# Altium PCB Main_PCB.PcbDoc
Units mm, origin at the board's own origin, x right, y up, seen from the top; angles counter-clockwise.
Board outline 150 x 60 mm, 2 copper layers (Top Layer, Bottom Layer); 25 components, 31 nets, 142 pads, 30 vias.
Unrouted connection lines stored in the file: 81.
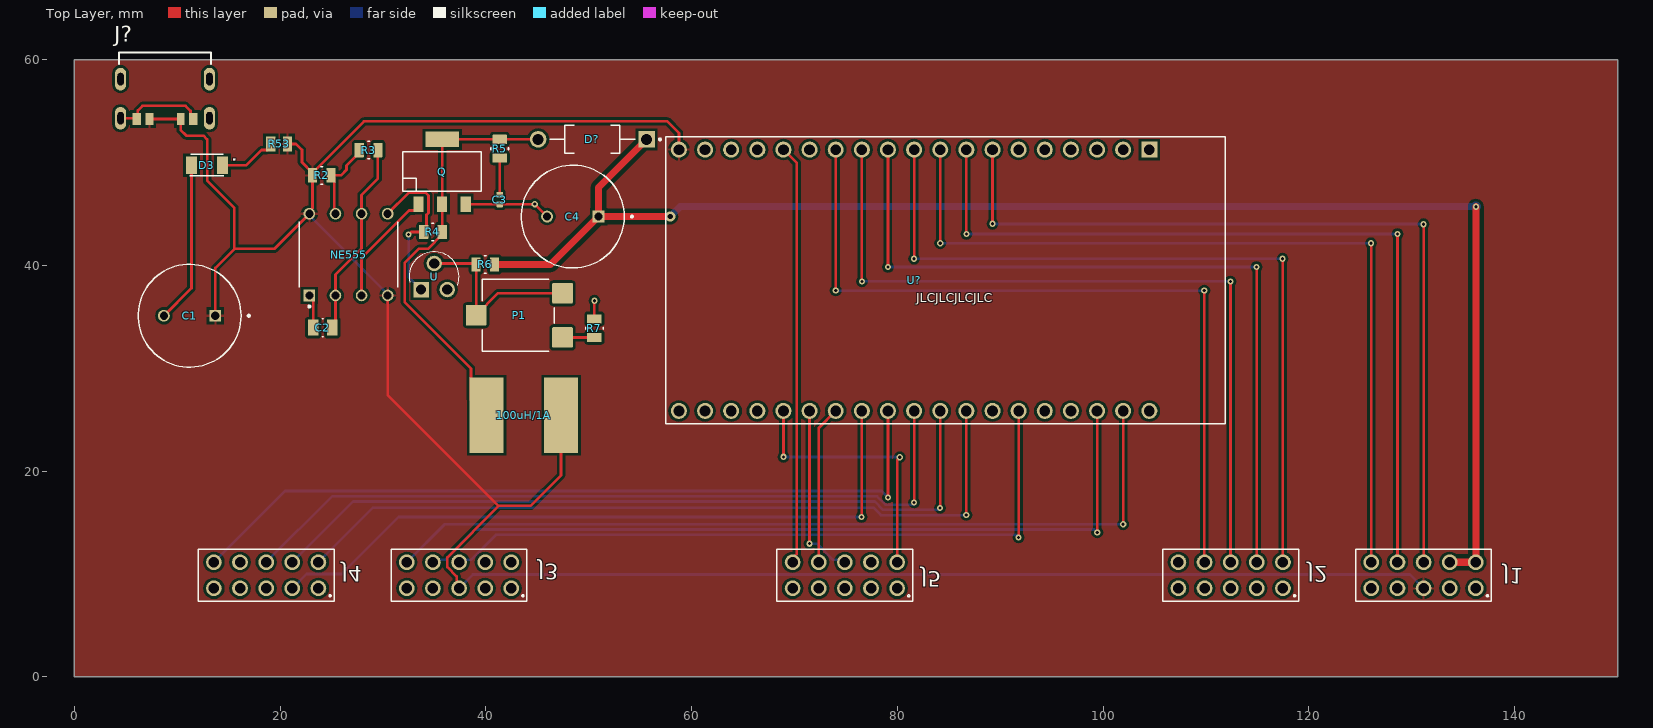
[diagram p0: Top Layer view]
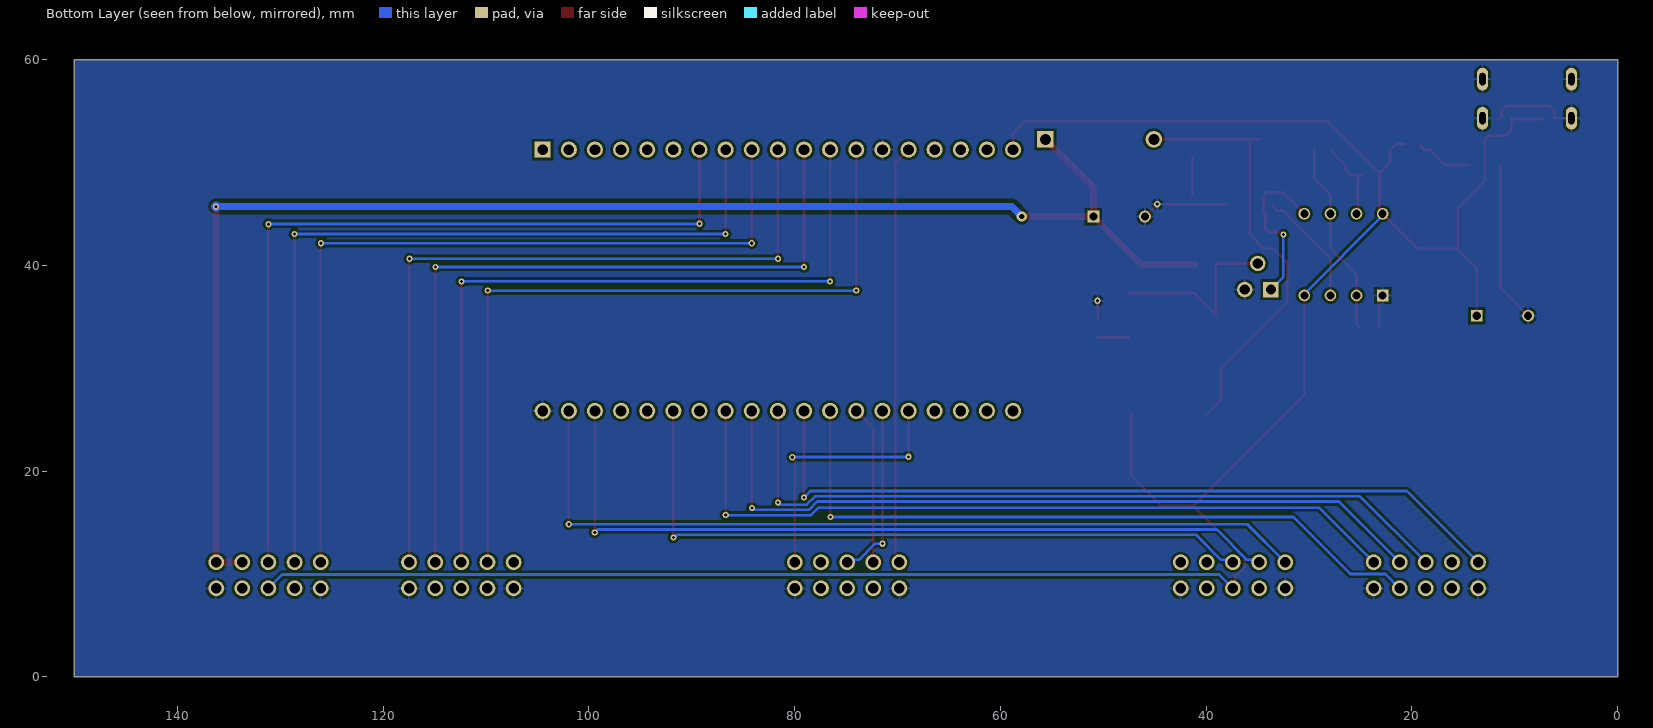
[diagram p1: Bottom Layer view, seen from below]

## Layer stack, top to bottom
Top Solder: solder mask 0.0102, Solder Resist, Dk 3.5
Top Layer: signal copper 0.0356
Dielectric 1: dielectric 0.32, FR-4, Dk 4.8
Bottom Layer: signal copper 0.0356
Bottom Solder: solder mask 0.0102, Solder Resist, Dk 3.5

## Board outline
0,0 0,60 150,60 150,0

## Design rules (kind name [scope] priority, off if disabled: settings)
Clearance Clearance_U5 [InComponent('U5')] p1: gap=0.25 ignorepadtopadclearanceinfootprint=FALSE except(0.15: Arc-SMDPad Arc-THPad Arc-Via Track-SMDPad Track-THPad Track-Via SMDPad-SMDPad SMDPad-THPad SMDPad-Via THPad-THPad THPad-Via Via-Via)
Clearance [All] p2: gap=0.25 ignorepadtopadclearanceinfootprint=FALSE
HoleSize [All] p1: absolutevalues=TRUE maxlimit=3.2 minlimit=0.025 maxpercent=80.000 minpercent=20.000
MinimumSolderMaskSliver [All] p1: minsoldermaskwidth=0.15
PolygonConnect [All] p1: connectstyle=Relief reliefconductorwidth=0.254 reliefentries=4 polygonreliefangle="90 Angle" airgapwidth=0.254
RoutingVias [All] p1: holewidth=0.3 width=0.6 viastyle="Through Hole" minholewidth=0.3 minwidth=0.6 maxholewidth=0.3 maxwidth=0.6
SilkToSilkClearance [All] p1: silktosilkclearance=0.16
SilkToSolderMaskClearance [IsPad] p1: minsilkscreentomaskgap=0.1 clearancetoexposedcopper=TRUE
SolderMaskExpansion [All] p1: expansion=0.1 istentingtop=FALSE
Width [All] p1: maxlimit=0.5 minlimit=0.26 preferedwidth=0.26 minimp=50.000000 maximp=50.000000 favimp=50.000000
26 further rules are at their usual default settings.

## Components (designator, comment, footprint, x,y, rotation, side; value= is the part's Value field where it differs from the comment)
100uH/1A "ASMCI" PCBComponent_1 45.02,25.044 r90 top
C1 "470uF" CAPPRD500W60D1000H2200 11.2,35.1 r180 top
C2 "2n2 / 50V" C_0805_A 24.146,33.944 r0 top
C3 "100p /25V" C_0402_A 41.346,46.395 r90 top
C4 "4.7uF" CAPPRD500W60D1000H2200 48.446,44.744 r180 top
D3 "Rot" *LEDC3216X110_LTST-C230KFKT(Primary) 12.888,49.732 r0 top
D? "UF4004" DIOAD1055W87L533D272 50.346,52.244 r180 top
J1 "61301021821" *61301021821 131.14,9.874 r180 top
J2 "61301021821" *61301021821 112.39,9.874 r180 top
J3 "61301021821" *61301021821 37.39,9.874 r180 top locked
J4 "61301021821" *61301021821 18.64,9.874 r180 top
J5 "61301021821" *61301021821 74.89,9.874 r180 top
J? "USB4125-GF-A_REVA" GCT_USB4125-GF-A_REVA 8.812,54.3 r180 top
NE555 "NE555PE4" DIP794W45P254L959H508Q8 26.646,41.044 r90 top
P1 "2k" R_CA6V_SMD 43.246,35.144 r180 top
Q "STN4NF20L" SOT223 35.746,45.945 r0 top
R2 "1k" R_0805_A 24.046,48.744 r180 top
R3 "10k" R_0805_A 28.6,51.206 r180 top
R4 "56k" R_0805_A 34.846,43.244 r0 top
R5 "2k2" R_0805_A 41.346,51.344 r90 top
R6 "220k" R_0805_A 39.946,40.084 r0 top
R7 "470R" R_0805_A 50.546,33.894 r270 top
R53 "Res2" *CAPC2013X90N 19.9,51.8 r0 top value=1.2K
U "BC547B" TO127P254X732-3 36.246,40.184 r0 top
U? "ESP32-DEVKITC-32D" MODULE_ESP32-DEVKITC-32D 84.72,38.544 r270 top

## Footprints (in the part's own frame and the unit in brackets; to place one, negate y for a bottom-side part, rotate by r counter-clockwise, add the part's x,y. Pads: shape width x height; smd on the part's side, far side on the other; paste and mask are expansions set on the pad)
*61301021821 [mm]
  round 1.53 hole 1.02: 1(-5.08,1.27) 2(-5.08,-1.27) 3(-2.54,1.27) 4(-2.54,-1.27) 5(0,1.27) 6(0,-1.27) 7(2.54,1.27) 8(2.54,-1.27) 9(5.08,1.27) 10(5.08,-1.27)
  silkscreen extent -6.6,-2.54 6.6,2.54
*CAPC2013X90N [mil]
  rect 36x57 smd: 1(-32,0) 2(32,0)
*LEDC3216X110_LTST-C230KFKT(Primary) [mm]
  rect 1.1x1.73 smd: A(1.51,0) C(-1.51,0)
  silkscreen extent -1.65,-1.04 1.65,1.04, body extent -1.6,-0.8 1.6,0.8, height 1.1
C_0402_A [mm] "Chip Capacitor, 2-Leads, Body 1.00x0.50mm, IPC High Density"
  rrect10% 0.6x0.6 smd: 1(-0.45,0) 2(0.45,0)
  body extent -0.55,-0.3 0.55,0.3, height 0.6
C_0805_A [mm] "Chip Capacitor, 2-Leads, Body 2.00x1.25mm"
  rrect10% 1.05x1.55 smd: 1(-0.925,0) 2(0.925,0)
  silkscreen extent -0.05,-0.87 0.05,0.87, body extent -1.1,-0.72 1.1,0.73, height 0.7
CAPPRD500W60D1000H2200 [mm]
  round 1.15 hole 0.8: N(2.5,0)
  rect 1.15x1.15 hole 0.8: P(-2.5,0)
  silkscreen extent -5.85,-5 5,5
DIOAD1055W87L533D272 [mm]
  round 1.61 hole 1.07: A(5.275,0)
  rect 1.61x1.61 hole 1.07: C(-5.275,0)
  silkscreen extent -6.67,-1.36 4.15,1.36, body extent -1.17,-1.17 1.17,1.17, height 27.72
DIP794W45P254L959H508Q8 [mm]
  rect 1.13x1.13 hole 0.78: 1(-3.97,3.81)
  round 1.13 hole 0.78: 2(-3.97,1.27) 3(-3.97,-1.27) 4(-3.97,-3.81) 5(3.97,-3.81) 6(3.97,-1.27) 7(3.97,1.27) 8(3.97,3.81)
  silkscreen extent -5.13,-4.79 3.18,4.79
GCT_USB4125-GF-A_REVA [mm]
  rect 0.76x1.2 smd: A9(1.52,0.08) B9(-1.52,0.08)
  rect 0.8x1.2 smd: A12(2.75,0.08) B12(-2.75,0.08)
  oval 1.1x2.2 hole 0.6 slot 1.2 at 90 deg: S1(-4.32,0) S2(4.32,0) S3(-4.32,-3.8) S4(4.32,-3.8)
  silkscreen extent -4.47,-6.4 4.47,-5.25
MODULE_ESP32-DEVKITC-32D [mm]
  rect 1.56x1.56 hole 1.04: 1(-12.7,19.76)
  round 1.56 hole 1.04: 2(-12.7,17.22) 3(-12.7,14.68) 4(-12.7,12.14) 5(-12.7,9.6) 6(-12.7,7.06) 7(-12.7,4.52) 8(-12.7,1.98) 9(-12.7,-0.56) 10(-12.7,-3.1) 11(-12.7,-5.64) 12(-12.7,-8.18) 13(-12.7,-10.72) 14(-12.7,-13.26) 15(-12.7,-15.8) 16(-12.7,-18.34) 17(-12.7,-20.88) 18(-12.7,-23.42) 19(-12.7,-25.96) 20(12.7,19.76) 21(12.7,17.22) 22(12.7,14.68) 23(12.7,12.14) 24(12.7,9.6) 25(12.7,7.06) 26(12.7,4.52) 27(12.7,1.98) 28(12.7,-0.56) 29(12.7,-3.1) 30(12.7,-5.64) 31(12.7,-8.18) 32(12.7,-10.72) 33(12.7,-13.26) 34(12.7,-15.8) 35(12.7,-18.34) 36(12.7,-20.88) 37(12.7,-23.42) 38(12.7,-25.96)
  silkscreen extent -13.95,-27.25 13.95,27.15, body extent -13.97,-24.8 13.97,30.3, height 3.25
PCBComponent_1 [mm]
  rect 7.3x3.3 smd: 2(0.381,4.953) 2(0.381,-2.286)
R_0805_A [mm] "Chip Resistor, 2-Leads, Body 2.00x1.25mm, IPC High Density"
  rrect10% 0.9x1.4 smd: 1(-0.9,0) 2(0.9,0)
  silkscreen extent -0.1,-0.85 0.1,0.85, body extent -1.07,-0.7 1.08,0.7, height 0.65
R_CA6V_SMD [mm]
  rrect10% 2x2 smd: 1(-4.2,2.15) 2(4.2,0) 3(-4.2,-2.15)
  silkscreen extent -3.4,-3.52 3.6,3.5, body extent -4.31,-3.37 4.23,3.34, height 5.2
SOT223 [mil]
  rect 39x59 smd: 1(-90,0) 2(0,0) 3(90,0)
  rect 129x59 smd: T(0,248)
  silkscreen extent -150,50 150,200
TO127P254X732-3 [mil]
  rect 59x59 hole 39: 1(-100,-100)
  round 59 hole 39: 2(-50,0) 3(0,-100)
  silkscreen extent -146,-83 45,45

## Part data
100uH/1A: library part ASMCI-0603-R10M-T, "Ind Chip Shielded Multi-Layer 100nH 20% 1MHz Ferrite 700mA 0603 T/R", Package=None, Availability=Unavailable, MP=ASMCI-0603-R10M-T, Price=None
C1 C4: library part UPM1E471MPD1TD, "PM Series 470 uF 25 V 105Â°C Ã˜10 x 20 mm LS=5 mm Radial Aluminum Electrolytic Cap", Package="Radial Nichicon", Availability=Good, Check_prices=https://www.snapeda.com/parts/UPM1E471MPD1TD/Nichicon/view-part/2321207/?ref=eda, MF=Nichicon, MP=UPM1E471MPD1TD, Price=None, Purchase-URL=https://pricing.snapeda.com/search/part/UPM1E471MPD1TD/?ref=eda, SnapEDA_Link=https://www.snapeda.com/parts/UPM1E471MPD1TD/Nichicon/view-part/2321207/?ref=snap
C2: library part "300 129", "C 2n2 10% 50V X7R 0805", %=10, A=1, Assembly=SMD, C1=x, C2=1, C3=4, Component Type=Capacitor, ComponentLink1Description=Datasheet, ComponentLink1URL="\\vm-pizol\DATEN\Fabdaten\3xx xxx\30x xxx\300 xxx\300 1xx\300129_C_2.2nF_10%_50V_X7R_0805", Cost=0.004800, Ea1=0.35, Ea2=x, Failure rate=2, Ieff=x, Imax=x, IrefImax=x, Part Number="300 129", Pin Count=2, Pmax=x, Published=08.01.2016, Publisher=RKE, State=active, Tref=40, Umax=50V, UrefUmax=0.5
C3: library part "301 048", "C 100p 5% 25V C0G 0402", %=5, A=1, Assembly=SMD, C1=x, C2=1, C3=4, Component Type=Capacitor, ComponentLink1Description=Datasheet, ComponentLink1URL="\\vm-pizol\DATEN\Fabdaten\3xx xxx\30x xxx\301 xxx\301 0xx\301048_C_100pF_5%_25V_COG_0402", Cost=0.001200, Ea1=0.35, Ea2=x, Failure rate=1, Ieff=x, Imax=x, IrefImax=x, Part Number="301 048", Pin Count=2, Pmax=x, Published=08.01.2016, Publisher=RKE, State=active, Tref=40, Umax=25V, UrefUmax=0.5
D3: library part LTST-C230KFKT, "LED; SMD; 1206; orange; 45-90mcd; 3.2x1.6x1.1mm; 130Â°; 2Ã·2.4V; 20mA", Package="1206 Lite-On", Availability=Unavailable, MF="Lite-On Inc.", MP=LTST-C230KFKT, Price=None, SnapEDA_Link=https://www.snapeda.com/parts/LTST-C230KFKT/Lite-On%20Inc./view-part/?ref=snap
D?: "Diode Standard 400V 1A Through Hole DO-204AL (DO-41)", Package="DO-41-2 ON Semiconductor", Availability=Good, MF="ON Semiconductor", MP=UF4004, Price=None, Purchase-URL=https://pricing.snapeda.com/search/part/UF4004/?ref=eda, SnapEDA_Link=https://www.snapeda.com/parts/UF4004/ON%20Semiconductor/view-part/1592468/?ref=snap
J1 J2 J3 J4 J5: "Female header [WÃ¼rth Elektronik] 61301021821 Female header", Package=None, Digi-Key_Part_Number=732-2861-ND, Digi-Key_Purchase_URL=https://www.digikey.ch/product-detail/en/wurth-electronics-inc/61301021821/732-2861-ND/2508630?utm_source=snapeda&utm_medium=aggregator&utm_campaign=symbol, MF="Wurth Electronics", MP=61301021821, SnapEDA_Link=https://www.snapeda.com/parts/61301021821/Wurth%20Electronics%20Inc./view-part/?ref=snap
J?: "USB 2.0 Type C Receptacle, Horizontal, SMT, For Power charging", Package=None, Availability=Unavailable, Check_prices=https://www.snapeda.com/parts/USB4125-GF-A/Global%20Connector%20Technology/view-part/5160675/?ref=eda, MF="Global Connector Technology", MP=USB4125-GF-A, Price=None, SnapEDA_Link=https://www.snapeda.com/parts/USB4125-GF-A/Global%20Connector%20Technology/view-part/5160675/?ref=snap
NE555: "Single Precision Timer 8-PDIP 0 to 70", Package="PDIP-8 Texas Instruments", Availability=Warning, MF="Texas Instruments", Mouser-Purchase-URL=https://snapeda.com/shop?store=Mouser&id=5082, MP=NE555PE4, Price=None, SnapEDA_Link=https://www.snapeda.com/parts/NE555PE4/Texas%20Instruments/view-part/5082/?ref=snap, Texas_Instruments-Purchase-URL=https://snapeda.com/shop?store=Texas+Instruments&id=5082
P1: library part "301 472", "R 2k 25% 100mW Trimmer lin 6.5x6.5", %=25, A=0.87, Assembly=SMD, C1=x, C2=x, C3=x, C4=x, C5=x, Component Type=Resistor, ComponentLink1Description=Datasheet, ComponentLink1URL="\\vm-pizol\DATEN\Fabdaten\3xx xxx\30x xxx\301 xxx\301 4xx\301472_R_2K_25%_Trimmpoti_CA6V_lin", Cost=0.120300, Ea1=0.16, Ea2=0.44, Failure rate=30, Ieff=x, Imax=x, IrefImax=x, LatestRevisionDate=30.06.2016/RKE, Part Number="301 472", Pin Count=3, Pmax=0.100, Published=29.04.2016, Publisher=MFL, State=active, SW Count=x, Tref=55, Ueff=x, Umax=100V, Uref=x, UrefUmax=x
Q: "N-Channel 200V 1A _Tc_ 3.3W _Tc_ Surface Mount SOT-223", Package="SOT-223 STMicroelectronics", Availability=Unavailable, MF=STMicroelectronics, MP=STN4NF20L, Price=None, SnapEDA_Link=https://www.snapeda.com/parts/STN4NF20L/STMicroelectronics/view-part/106602/?ref=snap
R2: library part "300 074", "R 1k 1% 125mW 0805", %=1, A=0.87, Assembly=SMD, C1=x, C2=x, C3=x, C4=x, C5=x, Component Type=Resistor, ComponentLink1Description=Datasheet, ComponentLink1URL="\\vm-pizol\DATEN\Fabdaten\3xx xxx\30x xxx\300 xxx\300 0xx\300074_R_1K_5%_125mW_0805", Cost=0.002000, Ea1=0.16, Ea2=0.44, Failure rate=0.2, Ieff=x, Imax=x, IrefImax=x, Part Number="300 074", Pin Count=2, Pmax=0.125, Published=27.04.2016, Publisher=MFL, State=active, SW Count=x, Tref=55, Ueff=x, Uref=x, UrefUmax=x
R3: library part "300 080", "R 10k 1% 125mW 0805", %=1, A=0.87, Assembly=SMD, C1=x, C2=x, C3=x, C4=x, C5=x, Component Type=Resistor, ComponentLink1Description=Datasheet, ComponentLink1URL="\\vm-pizol\DATEN\Fabdaten\3xx xxx\30x xxx\300 xxx\300 0xx\300080_R_10K_1%_125mW_0805", Cost=0.002000, Ea1=0.16, Ea2=0.44, Failure rate=0.2, Ieff=x, Imax=x, IrefImax=x, Part Number="300 080", Pin Count=2, Pmax=0.125, Published=27.04.2016, Publisher=MFL, State=active, SW Count=x, Tref=55, Ueff=x, Uref=x, UrefUmax=x
R4: library part "302 780", "R 56k 1% 125mW 0805", %=1, A=0.87, Assembly=SMD, C1=x, C2=x, C3=x, C4=x, C5=x, Component Type=Resistor, ComponentLink1Description=Datasheet, ComponentLink1URL="\\vm-pizol\DATEN\Fabdaten\3xx xxx\30x xxx\302 xxx\302 7xx\302780", Cost=0.003200, Ea1=0.16, Ea2=0.44, Failure rate=0.2, Ieff=x, Imax=x, IrefImax=x, Part Number="302 780", Pin Count=2, Pmax=0.125, Published=28.04.2016, Publisher=MFL, State=active, SW Count=x, Tref=55, Ueff=x, Uref=x, UrefUmax=x
R5: library part "300 848", "R 2k2 5% 125mW 0805", %=5, A=0.87, Assembly=SMD, C1=x, C2=x, C3=x, C4=x, C5=x, Component Type=Resistor, ComponentLink1Description=Datasheet, ComponentLink1URL="\\vm-pizol\DATEN\Fabdaten\3xx xxx\30x xxx\300 xxx\300 8xx\300848_R_2K2_5%_125mW_0805", Cost=0.002000, Ea1=0.16, Ea2=0.44, Failure rate=0.2, Ieff=x, Imax=x, IrefImax=x, Part Number="300 848", Pin Count=2, Pmax=0.125, Published=28.04.2016, Publisher=MFL, State=active, SW Count=x, Tref=55, Ueff=x, Uref=x, UrefUmax=x
R6: library part "300 089", "R 220k 5% 125mW 0805", %=5, A=0.87, Assembly=SMD, C1=x, C2=x, C3=x, C4=x, C5=x, Component Type=Resistor, ComponentLink1Description=Datasheet, ComponentLink1URL="\\vm-pizol\DATEN\Fabdaten\3xx xxx\30x xxx\300 xxx\300 0xx\300089_R_220K_5%_125mW_0805", Cost=0.002000, Ea1=0.16, Ea2=0.44, Failure rate=0.2, Ieff=x, Imax=x, IrefImax=x, Part Number="300 089", Pin Count=2, Pmax=0.125, Published=28.04.2016, Publisher=MFL, State=active, SW Count=x, Tref=55, Ueff=x, Uref=x, UrefUmax=x
R7: library part "300 073", "R 470R 5% 125mW 0805", %=5, A=0.87, Assembly=SMD, C1=x, C2=x, C3=x, C4=x, C5=x, Component Type=Resistor, ComponentLink1Description=Datasheet, ComponentLink1URL="\\vm-pizol\DATEN\Fabdaten\3xx xxx\30x xxx\300 xxx\300 0xx\300073_R_470R_5%_125mW_0805", Cost=0.001900, Ea1=0.16, Ea2=0.44, Failure rate=0.2, Ieff=x, Imax=x, IrefImax=x, Part Number="300 073", Pin Count=2, Pmax=0.125, Published=27.04.2016, Publisher=MFL, State=active, SW Count=x, Tref=55, Ueff=x, Uref=x, UrefUmax=x
R53: "Resistor", LatestRevisionDate=17-Jul-2002, LatestRevisionNote="Re-released for DXP Platform.", PackageDescription="Axial Device, Thru-Hole; 2 Leads; 0.4 in Pin Spacing", PackageReference=AXIAL-0.4, Published=8-Jun-2000, Publisher="Altium Limited"
U: "Bipolar _BJT_ Transistor NPN 45V 100mA 300MHz 500mW Through Hole TO-92-3", Package="TO-226-3 ITT / Cannon", Availability=Unavailable, MF="ON Semiconductor", MP=BC547B, Price=None, SnapEDA_Link=https://www.snapeda.com/parts/BC547B/ON%20Semiconductor/view-part/2777874/?ref=snap
U?: "EVAL BOARD FOR ESP-WROOM-32", Package=None, Availability=Warning, Check_prices=https://www.snapeda.com/parts/ESP32-DEVKITC-32D/Espressif%20Systems/view-part/2777395/?ref=eda, MF="Espressif Systems", MP=ESP32-DEVKITC-32D, Price=None, Purchase-URL=https://pricing.snapeda.com/search/part/ESP32-DEVKITC-32D/?ref=eda, SnapEDA_Link=https://www.snapeda.com/parts/ESP32-DEVKITC-32D/Espressif%20Systems/view-part/2777395/?ref=snap

## Via types
v1: diameter 0.6, hole 0.3, Top Layer to Bottom Layer, 29 vias
v2: diameter 1, hole 0.5, Top Layer to Bottom Layer, 1 vias

## Nets (pads, with @x,y where several pads share a name; then routed paths per layer and width w, separated by ;. In a path a pad name is that pad's centre, name@x,y a point inside that pad or via, vN(x,y) a via of type N, cw(c..) or ccw(c..) an arc to the next point about the centre after c; other vN are vias at no path point)
+5: 100uH/1A.2@47.306,25.425 C1.P J1.5 J3.5 J?.A9 J?.B9 NE555.4 NE555.8 R2.2 R53.2 U?.19 | length 237.5
  Top Layer w0.26: J?.A9 J?.B9 10.332,53.142 10.874,52.6 12.542,52.6 12.9,52.242 12.9,48.225 15.546,45.579 15.546,41.604 ; C1.P 13.7,39.758 15.546,41.604 ; R53.2 21.548,51.8 22.119,51.229 22.119,50.021 R2.2@23.146,48.994 ; NE555.4 30.456,27.407 41.245,16.618 ; J3.5 37.156,8.838 37.156,9.759 36.245,10.67 36.245,11.618 41.245,16.618 ; 100uH/1A.2@47.306,25.518 47.306,19.588 44.337,16.618 41.245,16.618 ; U?.19 58.76,52.871 57.631,54 28.152,54 R2.2@23.146,48.994 ; 15.546,41.604 19.426,41.604 NE555.8 22.836,45.25 23.146,45.56 R2.2 R2.2@23.146,48.994
  Bottom Layer w0.26: NE555.8 22.836,44.854 NE555.4@30.456,37.234 ; J3.5 38.73,9.944 129.8,9.944 J1.5
GND: C1.N C2.1 C3.1 C4.N D3.C J1.1 J1.9 J2.1 J2.9 J3.1 J3.9 J4.1 J4.9 J5.1 J5.9 J?.A12 J?.B12 J?.S1 J?.S2 J?.S3 J?.S4 NE555.1 Q.3 R7.1 U.3 U?.14 U?.20 | length 38.1
  Top Layer w0.26: J?.S2 5.982,54.3 J?.A12 6.169,54.328 6.169,55.058 6.612,55.5 10.812,55.5 11.292,55.02 11.292,54.49 J?.B12 ; C1.N 11.378,37.778 D3.C ; NE555.1 23.221,36.689 C2.1 ; Q.3 C3.1 v1(44.745,45.945) C4.N ; R7.1 v1(50.546,36.56)
"HV ⚡": C4.P D?.C J1.2 J1.4 R6.2 | length 144.1
  Top Layer w0.7: R6.2@41.048,40.084 46.286,40.084 C4.P ; D?.C 50.946,47.569 C4.P ; v2(57.92,44.744) C4.P ; J1.4 J1.2 v1(136.22,45.698)
  Bottom Layer w0.26: v1@136.197,45.721 v1(136.22,45.698)
  Bottom Layer w0.7: v2(57.92,44.744) 58.897,45.721 v1@136.197,45.721
  Bottom Layer w1: v1@136.197,45.721 v1@136.22,45.721
Net100uH/1A_2: 100uH/1A.2@40.067,25.425 D?.A Q.2 Q.T R4.2 R5.2 | length 42.4
  Top Layer w0.26: Q.T@34.857,52.244 Q.T ; 100uH/1A.2@40.067,25.425 38.547,26.945 38.547,29.973 32.12,36.4 32.12,40.265 33.46,41.604 34.356,41.604 35.746,42.994 R4.2 Q.2 Q.T ; D?.A R5.2 Q.T
NetC2_2: C2.2 NE555.2 NE555.6 R3.1 | length 19.1
  Top Layer w0.26: C2.2 25.376,34.249 NE555.2 25.376,39.104 27.916,41.644 NE555.6 27.916,46.845 29.5,48.429 R3.1
NetC3_2: C3.2 R5.1 | length 3.6
  Top Layer w0.26: C3.2 R5.1
NetD3_A: D3.A R53.1 | length 5.7
  Top Layer w0.26: D3.A 16.72,49.732 18.195,51.206 18.76,51.206 19.087,51.533 R53.1
NetJ1_6: J1.6 U?.7 | length 82
  Top Layer w0.26: v1(89.24,44.044) U?.7 ; J1.6 v1(131.14,43.998)
  Bottom Layer w0.26: v1(89.24,44.044) 89.263,44.021 131.117,44.021 v1(131.14,43.998)
NetJ1_8: J1.8 U?.8 | length 82
  Top Layer w0.26: v1@86.695,43.044 v1(86.7,43.049) U?.8 ; J1.8 v1(128.6,43.044)
  Bottom Layer w0.26: v1(86.7,43.049) 86.703,43.047 128.598,43.047 v1(128.6,43.044)
NetJ1_10: J1.10 U?.9 | length 82
  Top Layer w0.26: v1(84.16,42.144) U?.9 ; v1(126.02,42.144) 126.04,42.124 126.04,11.164 J1.10
  Bottom Layer w0.26: v1(84.16,42.144) v1(126.02,42.144)
NetJ2_2: J2.2 U?.10 | length 75.9
  Top Layer w0.26: v1(81.62,40.644) U?.10 ; v1(117.44,40.644) 117.455,40.629 117.455,11.159 J2.2
  Bottom Layer w0.26: v1(81.62,40.644) v1(117.44,40.644)
NetJ2_4: J2.4 U?.11 | length 75.9
  Top Layer w0.26: v1(79.08,39.844) U?.11 ; v1(114.9,39.844) 114.915,39.829 114.915,11.159 J2.4
  Bottom Layer w0.26: v1(79.08,39.844) v1(114.9,39.844)
NetJ2_6: J2.6 U?.12 | length 75.9
  Top Layer w0.26: v1(76.54,38.444) U?.12 ; v1(112.36,38.444) 112.375,38.429 112.375,11.159 J2.6
  Bottom Layer w0.26: v1(76.54,38.444) v1(112.36,38.444)
NetJ2_8: J2.8 U?.13 | length 75.9
  Top Layer w0.26: v1(74,37.544) U?.13 ; v1(109.82,37.544) 109.835,37.529 109.835,11.159 J2.8
  Bottom Layer w0.26: v1(74,37.544) v1(109.82,37.544)
NetJ3_6: J3.6 U?.25 | length 67.9
  Top Layer w0.26: v1(91.78,13.544) U?.25
  Bottom Layer w0.26: J3.6 37.625,11.378 38.545,11.378 40.981,13.814 91.45,13.814 v1@91.75,13.514
NetJ3_8: J3.8 U?.22 | length 77.8
  Top Layer w0.26: U?.22 99.41,25.834 99.41,14.054 v1(99.42,14.044)
  Bottom Layer w0.26: J3.8 35.085,11.378 36.005,11.378 38.951,14.324 99.14,14.324 v1(99.42,14.044)
NetJ3_10: J3.10 U?.21 | length 82.2
  Top Layer w0.26: v1(101.94,14.834) U?.21
  Bottom Layer w0.26: J3.10 36,14.834 v1(101.94,14.834)
NetJ4_2: J4.2 U?.27 | length 75.6
  Top Layer w0.26: v1(86.69,15.734) 86.695,15.739 86.695,25.839 U?.27
  Bottom Layer w0.26: J4.2 29.02,16.444 77.676,16.444 78.396,15.724 86.68,15.724 v1(86.69,15.734) v1@86.7,15.744
NetJ4_3: J4.3 U?.31 | length 68.5
  Top Layer w0.26: v1(76.508,15.547) 76.524,15.563 76.524,25.828 U?.31
  Bottom Layer w0.26: J4.3 22.575,9.999 25.975,9.999 31.523,15.547 v1(76.508,15.547)
NetJ4_4: J4.4 U?.28 | length 75.2
  Top Layer w0.26: v1(84.15,16.424) 84.155,16.429 84.155,25.839 U?.28
  Bottom Layer w0.26: J4.4 27.08,17.044 77.797,17.044 78.608,16.234 84.15,16.234 v1@84.16,16.244
NetJ4_6: J4.6 U?.29 | length 74.9
  Top Layer w0.26: v1(81.62,16.934) U?.29
  Bottom Layer w0.26: J4.6 25.05,17.554 78.009,17.554 78.819,16.744 v1@81.62,16.744
NetJ4_10: J4.10 U?.30 | length 77
  Top Layer w0.26: v1(79.08,17.444) U?.30
  Bottom Layer w0.26: J4.10 20.48,18.064 78.46,18.064 v1(79.08,17.444)
NetJ5_2: J5.2 U?.34 | length 26.1
  Top Layer w0.26: v1@68.92,21.344 U?.34 ; J5.2 79.97,21.094 v1(80.22,21.344)
  Bottom Layer w0.26: v1(68.922,21.389) 68.944,21.367 80.198,21.367 v1(80.22,21.344)
NetJ5_6: J5.6 U?.33 | length 17.1
  Top Layer w0.26: v1(71.46,12.944) U?.33
  Bottom Layer w0.26: v1(71.46,12.944) 72.17,12.944 73.735,11.378 74.656,11.378 J5.6
NetJ5_8: J5.8 U?.32 | length 15.4
  Top Layer w0.26: J5.8 72.35,24.194 U?.32
NetJ5_10: J5.10 U?.15 | length 40.8
  Top Layer w0.26: U?.15 70.22,49.944 70.22,11.944 70.053,11.777 70.053,11.387 J5.10
NetNE555_3: NE555.3 Q.1 | length 11.5
  Top Layer w0.26: NE555.3 27.916,40.704 32.538,45.326 33.095,45.326 33.46,45.691 Q.1
NetNE555_5: NE555.5 R4.1 U.1 | length 16.1
  Top Layer w0.26: NE555.5 32.516,47.074 34.113,47.074 34.42,46.767 34.42,45.106 34.221,44.907 34.221,43.519 R4.1 32.741,43.244 v1(32.491,42.994)
  Bottom Layer w0.26: v1(32.491,42.994) 32.491,38.86 U.1
NetNE555_7: NE555.7 R2.1 R3.2 | length 8.1
  Top Layer w0.26: NE555.7 25.266,45.124 25.266,48.424 R2.1 25.898,48.744 26.446,49.293 26.446,49.702 27.7,50.956 R3.2
NetP1_1: P1.1 R7.2 | length 3.1
  Top Layer w0.26: P1.1 R7.2
NetP1_2: P1.2 P1.3 R6.1 U.2 | length 18.3
  Top Layer w0.26: U.2 38.946,40.184 R6.1 P1.2 41.196,37.294 P1.3
pads on no net: J1.3 J1.7 J2.3 J2.5 J2.7 J2.10 J3.2 J3.3 J3.4 J3.7 J4.5 J4.7 J4.8 J5.3 J5.4 J5.5 J5.7 U?.1 U?.2 U?.3 U?.4 U?.5 U?.6 U?.16 U?.17 U?.18 U?.23 U?.24 U?.26 U?.35 U?.36 U?.37 U?.38

## Polygon pours and split planes (outlines as drawn)
GND on Bottom Layer "GND_L02_P000" (solid, pour order 0): 0,60 0,0 150,0 150,60
+5 on Top Layer "+5_L01_P001" (solid, pour order 1): 0,60 0,0 150,0 150,60

## Silkscreen, mask and mechanical layers (free items; w line width, h text height)
Top Overlay:
  text "JLCJLCJLCJLC" at 81.832,36.117 h1.52
Mechanical 1:
  the board outline again, w0.1